# Altium PCB Модуль STM32F103RBT6.PcbDoc
Units mm, origin at the board's own origin, x right, y up, seen from the top; angles counter-clockwise.
Board outline 60 x 40 mm, 2 copper layers (Top Layer, Bottom Layer); 19 components, 58 nets, 200 pads, 36 vias.
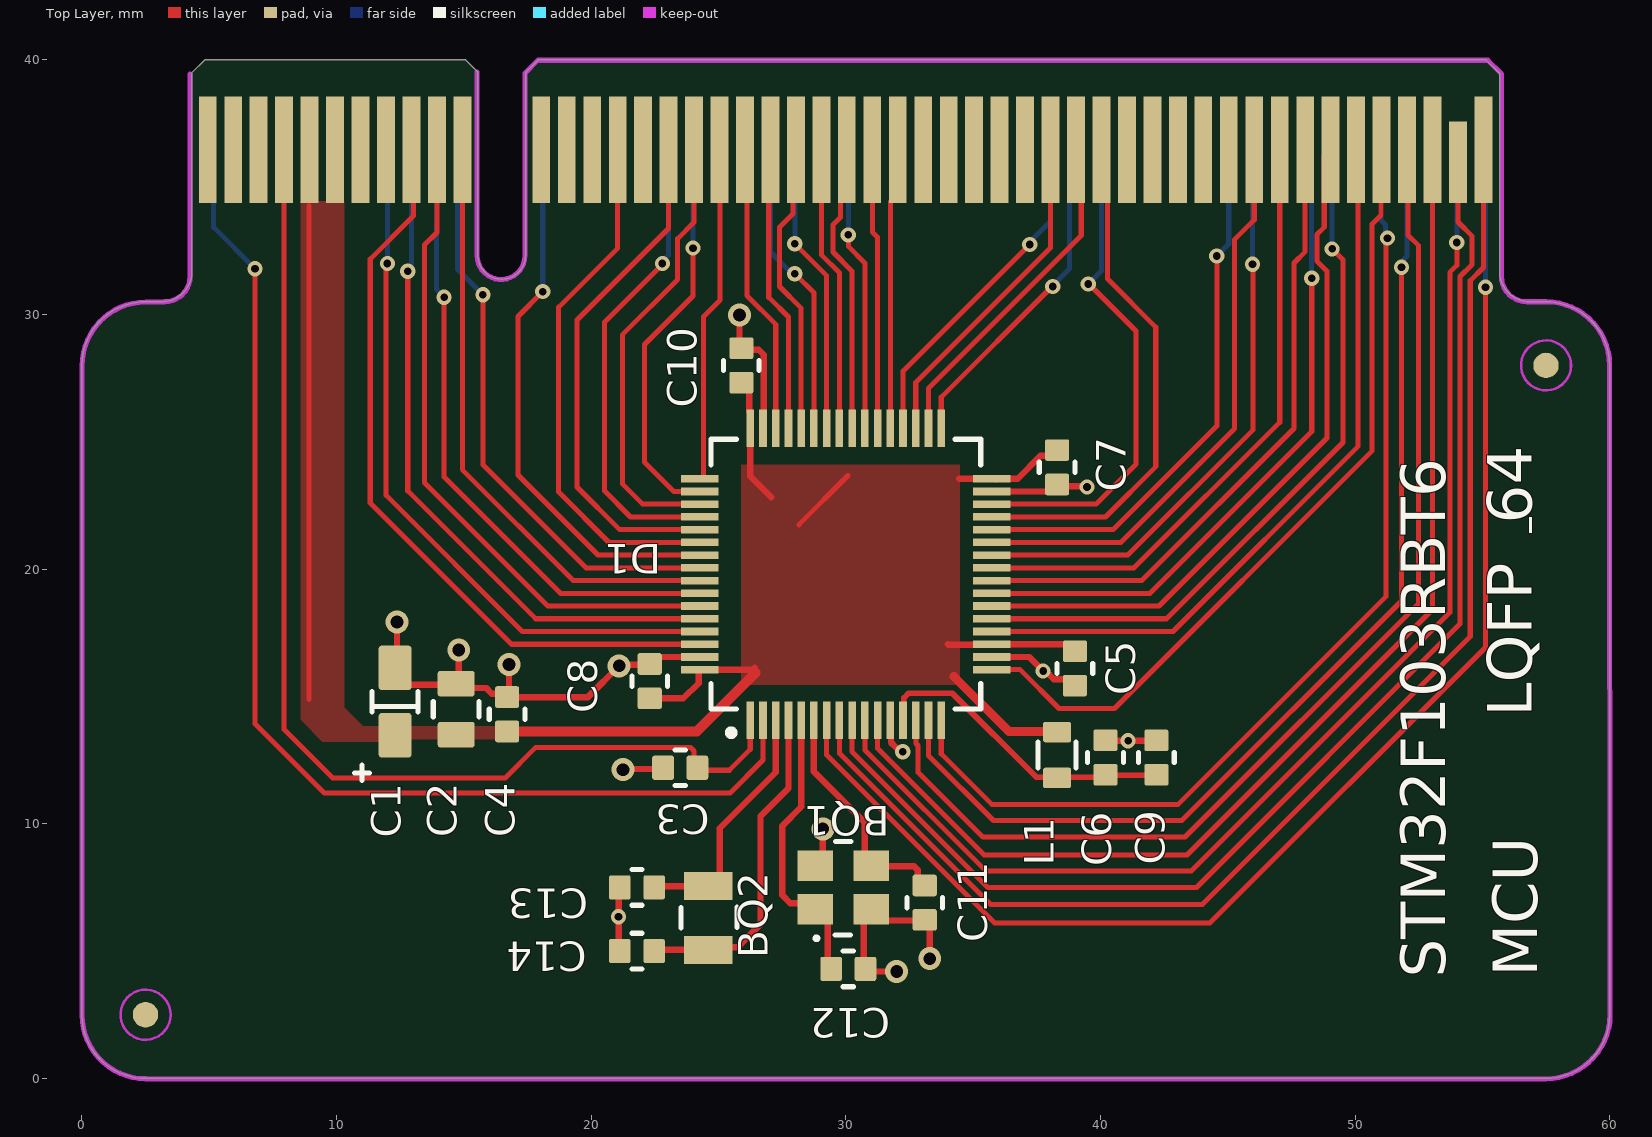
[diagram p0: Top Layer view]
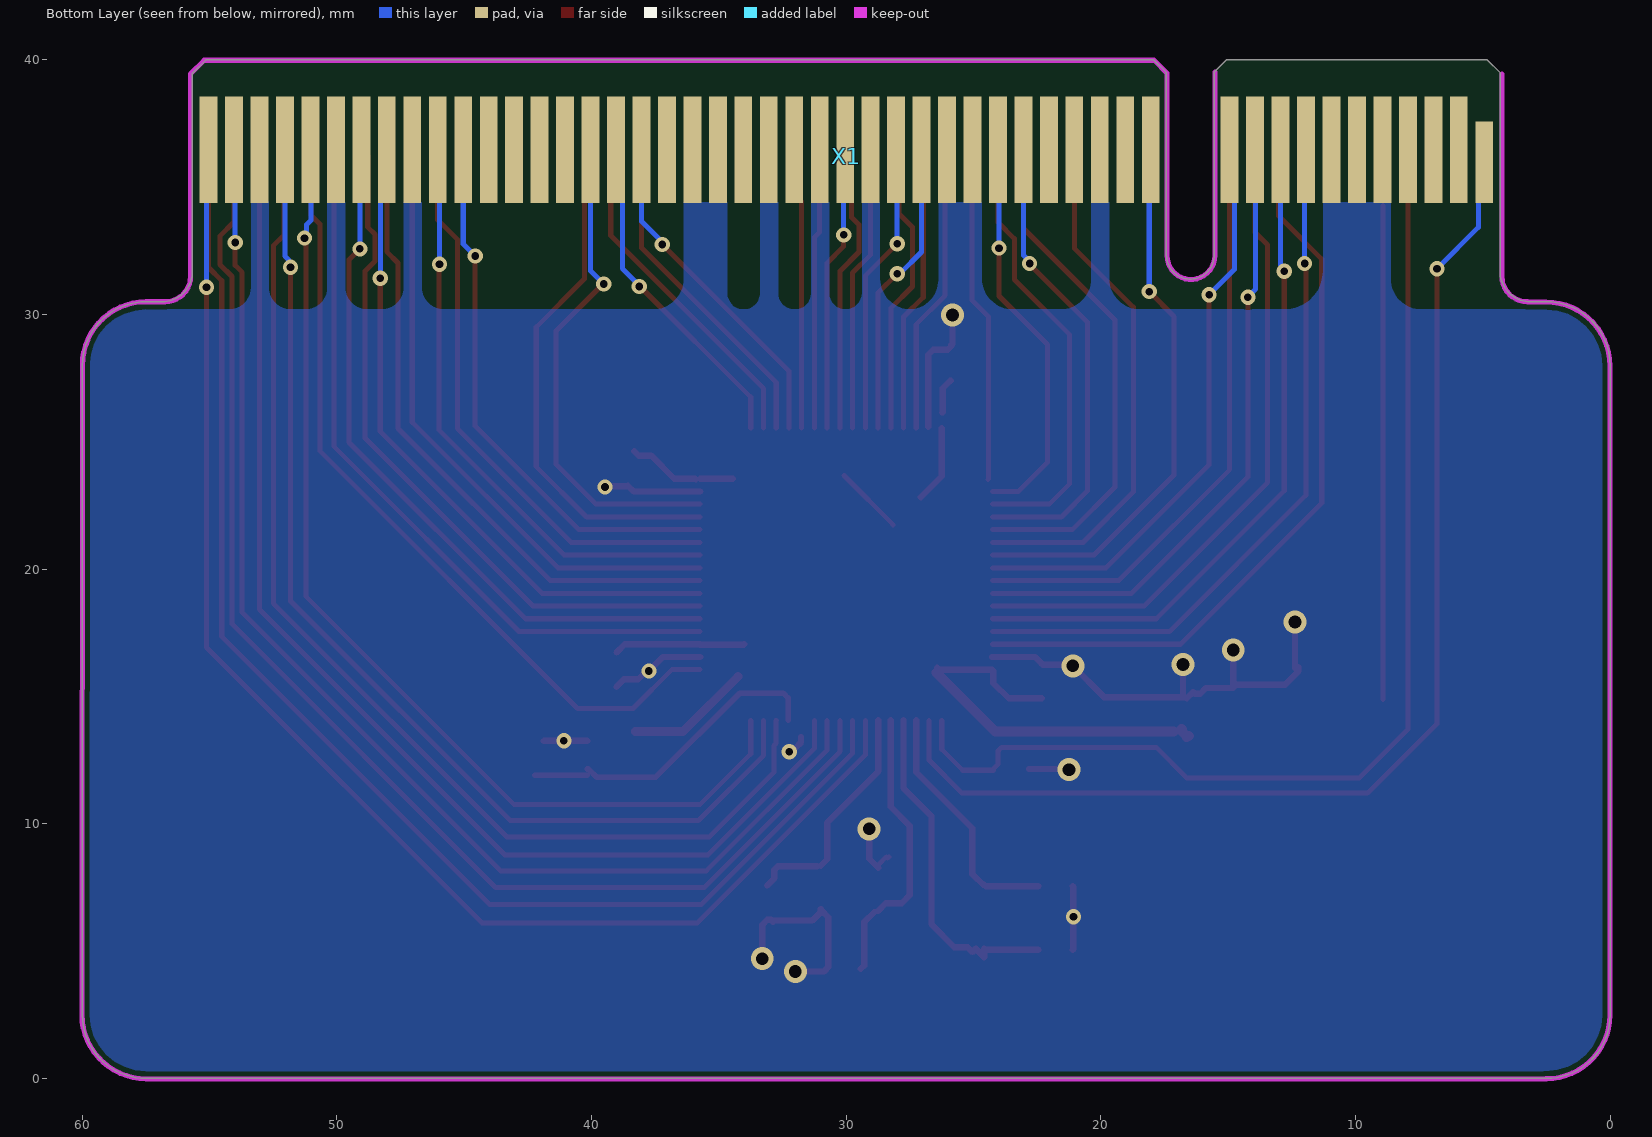
[diagram p1: Bottom Layer view, seen from below]
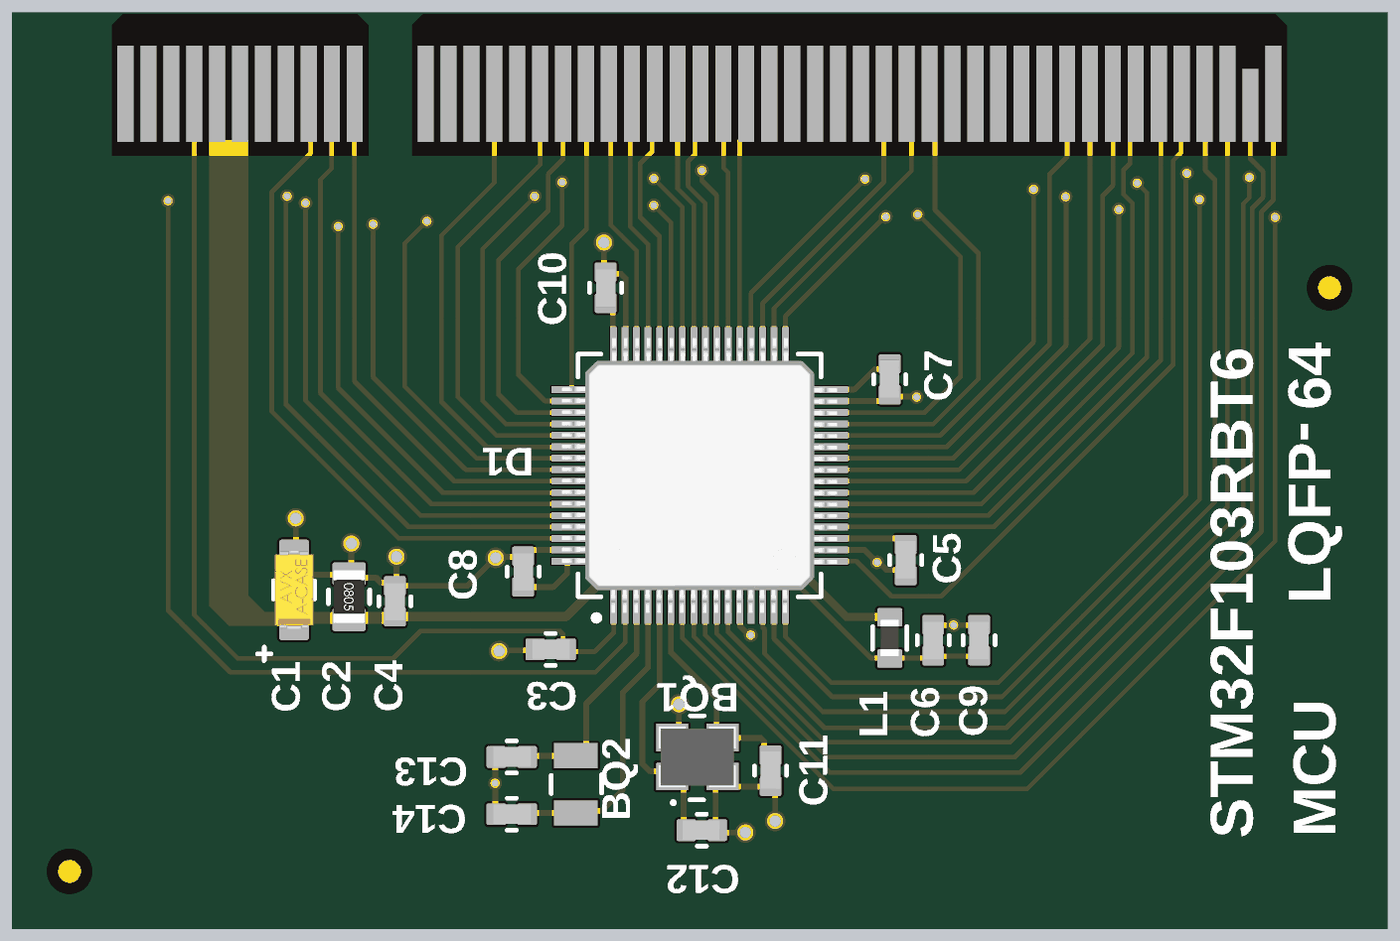
[diagram p2: 3D render of the assembled board from above, using the file's embedded part models]

## Layer stack, top to bottom
Top Solder: solder mask 0.0102, Solder Resist, Dk 3.5
Top Layer: signal copper 0.0356
Dielectric 1: dielectric 0.32, FR-4, Dk 4.8
Bottom Layer: signal copper 0.0356
Bottom Solder: solder mask 0.0102, Solder Resist, Dk 3.5

## Board outline
4.825,40 4.325,39.5 4.325,31.7 cw(c3.125,31.7) 3.125,30.5 2.5,30.5 ccw(c2.5,28) 0,28 0,2.5 ccw(c2.5,2.5) 2.5,0 57.5,0 ccw(c57.5,2.5) 60,2.5 60,28 ccw(c57.5,28) 57.5,30.5 56.875,30.5 cw(c56.875,31.7) 55.675,31.7 55.675,39.475 55.15,40 17.925,40 17.425,39.5 17.425,32.325 cw(c16.487,32.325) 15.55,32.325 15.55,39.525 15.075,40

## Design rules (kind name [scope] priority, off if disabled: settings)
Clearance [All] p1: gap=0.2 ignorepadtopadclearanceinfootprint=FALSE
ComponentClearance [All] p1 off: gap=0.254 collisioncheckmode=3 verticalgap=0.254 showdistances=FALSE
Height [All] p1 off: minheight=0 maxheight=25.4 prefheight=12.7
PolygonConnect [All] p1: connectstyle=Direct reliefconductorwidth=0.254 reliefentries=4 polygonreliefangle="90 Angle" airgapwidth=0.254
RoutingVias [All] p1: holewidth=0.5 width=0.9 viastyle="Through Hole" minholewidth=0.3 minwidth=0.6 maxholewidth=0.711 maxwidth=1.27
SolderMaskExpansion [All] p1: expansion=-0.8 istentingtop=FALSE soldermaskfromhole=TRUE
Width [All] p1: maxlimit=0.5 minlimit=0.2 preferedwidth=0.25 minimp=50.000000 maximp=50.000000 favimp=50.000000
28 further rules are at their usual default settings.

## Classes and differential pairs
component class "Модуль STM32F103RBT6": BQ1 BQ2 C1 C2 C3 C4 C5 C6 C7 C8 C9 C10 C11 C12 C13 C14 L1
component class "Модуль STM32F103RBT6_2": D1 X1

## Components (designator, comment, footprint, x,y, rotation, side; value= is the part's Value field where it differs from the comment)
BQ1 "кварцевый резонатор_1" SMD3225_4P20MHZ20PF10PPM 29.9,7.5 r0 top value="8 МГц"
BQ2 "3215" SMD3215_2P32768KHZ125PF10PPM 24.6,6.3 r270 top value="32,768 кГц"
C1 "A-case" K53-68_3216(A) 12.3,14.8 r90 top value="10 мк"
C2 "0805" K10-69B_2.0_1.25(0805) 14.7,14.5 r270 top value="1 мк"
C3 "0603" K10-79_1.6_0.8(0603) 23.5,12.2 r0 top value="0,01 мк"
C4 "0603" K10-79_1.6_0.8(0603) 16.7,14.3 r270 top value="0,1 мк"
C5 "0603" K10-79_1.6_0.8(0603) 39,16.1 r90 top value="0,01 мк"
C6 "0603" K10-79_1.6_0.8(0603) 40.2,12.6 r270 top value="0,1 мк"
C7 "0603" K10-79_1.6_0.8(0603) 38.3,24 r90 top value="0,01 мк"
C8 "0603" K10-79_1.6_0.8(0603) 22.3,15.6 r270 top value="0,01 мк"
C9 "0603" K10-79_1.6_0.8(0603) 42.2,12.6 r270 top value="0,01 мк"
C10 "0603" K10-79_1.6_0.8(0603) 25.9,28 r270 top value="0,01 мк"
C11 "0603" K10-79_1.6_0.8(0603) 33.1,6.9 r90 top value=30
C12 "0603" K10-79_1.6_0.8(0603) 30.1,4.3 r180 top value=30
C13 "0603" K10-79_1.6_0.8(0603) 21.8,7.5 r0 top value=15
C14 "0603" K10-79_1.6_0.8(0603) 21.8,5 r0 top value=15
D1 "(LQFP-48) Xilinx" QFP50P1200X1200X160-64N 30,19.8 r90 top value=STM32F103VBT6
L1 "0603" 742792651 38.3,12.7 r270 top value=TL160808
X1 "KONT_POLE_MEZ" 3113-112t_otv 31.043,35.97 r180 bottom

## Footprints (in the part's own frame and the unit in brackets; to place one, negate y for a bottom-side part, rotate by r counter-clockwise, add the part's x,y. Pads: shape width x height; smd on the part's side, far side on the other; paste and mask are expansions set on the pad)
3113-112t_otv [mm]
  rect 0.7x3.2 smd: A1(26.1,0)
  rect 0.7x4.2 smd: A2(25.1,0.5) A3(24.1,0.5) A4(23.1,0.5) A5(22.1,0.5) A6(21.1,0.5) A7(20.1,0.5) A8(19.1,0.5) A9(18.1,0.5) A10(17.1,0.5) A11(16.1,0.5) A12(13,0.5) A13(12,0.5) A14(11,0.5) A15(10,0.5) A16(9,0.5) A17(8,0.5) A18(7,0.5) A19(6,0.5) A20(5,0.5) A21(4,0.5) A22(3,0.5) A23(2,0.5) A24(1,0.5) A25(0,0.5) A26(-1,0.5) A27(-2,0.5) A28(-3,0.5) A29(-4,0.5) A30(-5,0.5) A31(-6,0.5) A32(-7,0.5) A33(-8,0.5) A34(-9,0.5) A35(-10,0.5) A36(-11,0.5) A37(-12,0.5) A38(-13,0.5) A39(-14,0.5) A40(-15,0.5) A41(-16,0.5) A42(-17,0.5) A43(-18,0.5) A44(-19,0.5) A45(-20,0.5) A46(-21,0.5) A47(-22,0.5) A48(-23,0.5) A49(-24,0.5)
  rect 0.7x4.2 smd far side: B1(26.1,0.5) B2(25.1,0.5) B3(24.1,0.5) B4(23.1,0.5) B5(22.1,0.5) B6(21.1,0.5) B7(20.1,0.5) B8(19.1,0.5) B9(18.1,0.5) B10(17.1,0.5) B11(16.1,0.5) B12(13,0.5) B13(12,0.5) B14(11,0.5) B15(10,0.5) B16(9,0.5) B17(8,0.5) B18(7,0.5) B19(6,0.5) B20(5,0.5) B21(4,0.5) B22(3,0.5) B23(2,0.5) B24(1,0.5) B25(0,0.5) B26(-1,0.5) B27(-2,0.5) B28(-3,0.5) B29(-4,0.5) B30(-5,0.5) B31(-6,0.5) B32(-7,0.5) B33(-8,0.5) B34(-9,0.5) B35(-10,0.5) B36(-11,0.5) B37(-12,0.5) B38(-13,0.5) B39(-14,0.5) B40(-15,0.5) B41(-16,0.5) B42(-17,0.5) B43(-18,0.5) B44(-19,0.5) B45(-20,0.5) B46(-21,0.5) B47(-22,0.5) B49(-24,0.5)
  rect 0.7x3.2 smd far side: B48(-23,0)
742792651 [mm]
  rrect20% 0.8x1.1 smd mask+0.102: 1(-0.9,0) 2(0.9,0)
  silkscreen extent -0.5,-0.75 0.5,0.75, body extent -0.8,-0.4 0.8,0.4, height 0.78
K10-69B_2.0_1.25(0805) [mm]
  rrect20% 1x1.45 smd mask+0.1: 1(-1,0) 2(1,0)
  silkscreen extent -0.3,-0.9 0.3,0.9, body extent -1.15,-0.67 1.15,0.68, height 0.76
K10-79_1.6_0.8(0603) [mm]
  rrect20% 0.85x0.95 smd mask+0.1: 1(-0.675,0) 2(0.675,0)
  silkscreen extent -0.2,-0.7 0.2,0.7, body extent -0.8,-0.42 0.84,0.43, height 0.41
K53-68_3216(A) [mm] "Molded Capacitor, 2-Leads, Body 3,20x1,60mm, IPC Medium Density"
  rrect20% 1.75x1.3 smd mask+0.1: 1(-1.325,0) 2(1.325,0)
  silkscreen extent -3.1,-0.9 0.4,1.6, body extent -1.7,-0.84 1.7,0.84, height 1.71
QFP50P1200X1200X160-64N [mm]
  rect 1.475x0.3 smd mask+0.05: 1(-5.738,3.75) 2(-5.738,3.25) 3(-5.738,2.75) 4(-5.738,2.25) 5(-5.738,1.75) 6(-5.738,1.25) 7(-5.738,0.75) 8(-5.738,0.25) 9(-5.738,-0.25) 10(-5.738,-0.75) 11(-5.738,-1.25) 12(-5.738,-1.75) 13(-5.738,-2.25) 14(-5.738,-2.75) 15(-5.738,-3.25) 16(-5.738,-3.75) 33(5.738,-3.75) 34(5.738,-3.25) 35(5.738,-2.75) 36(5.738,-2.25) 37(5.738,-1.75) 38(5.738,-1.25) 39(5.738,-0.75) 40(5.738,-0.25) 41(5.738,0.25) 42(5.738,0.75) 43(5.738,1.25) 44(5.738,1.75) 45(5.738,2.25) 46(5.738,2.75) 47(5.738,3.25) 48(5.738,3.75)
  rect 0.3x1.475 smd mask+0.05: 17(-3.75,-5.738) 18(-3.25,-5.738) 19(-2.75,-5.738) 20(-2.25,-5.738) 21(-1.75,-5.738) 22(-1.25,-5.738) 23(-0.75,-5.738) 24(-0.25,-5.738) 25(0.25,-5.738) 26(0.75,-5.738) 27(1.25,-5.738) 28(1.75,-5.738) 29(2.25,-5.738) 30(2.75,-5.738) 31(3.25,-5.738) 32(3.75,-5.738) 49(3.75,5.738) 50(3.25,5.738) 51(2.75,5.738) 52(2.25,5.738) 53(1.75,5.738) 54(1.25,5.738) 55(0.75,5.738) 56(0.25,5.738) 57(-0.25,5.738) 58(-0.75,5.738) 59(-1.25,5.738) 60(-1.75,5.738) 61(-2.25,5.738) 62(-2.75,5.738) 63(-3.25,5.738) 64(-3.75,5.738)
  silkscreen extent -6.35,4.38 -6.1,4.62, body extent -6,-6 6,6, height 1.31
SMD3215_2P32768KHZ125PF10PPM [mm]
  rect 1.1x1.9 smd mask+0.102: 1(-1.25,0) 2(1.25,0)
  silkscreen extent -0.42,-1.07 0.4,1.13
SMD3225_4P20MHZ20PF10PPM [mm]
  rect 1.4x1.2 smd mask+0.102: 1(-1.1,-0.85) 2(1.1,-0.85) 3(1.1,0.85) 4(-1.1,0.85)
  silkscreen extent -1.1,-2.05 -1,-1.95, body extent -1.68,-1.33 1.68,1.33, height 0.9

## Part data
BQ1: Package=0705, PartNumber=MQ-12.000-18, Company=Mercury
BQ2: library part "кварцевый резонатор", PartNumber="32,768 кГц 3215 SMD", Company=Mercury, Package=3215
C1: library part C+, Package=A-case
C2 C3 C4 C5 C6 C7 C8 C9 C10 C11 C12 C13 C14: library part C
  C2: Package=0805
  C3 C4 C5 C6 C7 C8 C9 C10 C11 C12 C13 C14: Package=0603
D1: library part STM32F103RBT6, Package=LQFP-48, Company=Xilinx, PurtNamber=XC6SLX25-2FGG484C
L1: library part SH6028-5R0YLB, CurrentMax=2,4А, PartNumber=TL160808, Company="ABC Electronics Group", Package=0603
X1: library part 3113-112T

## Free pads (board coordinates)
  round 1 smd paste-1 mask+0.5: 1(2.5,2.5) 1(57.5,28)

## Via types
v1: diameter 0.6, hole 0.3, Top Layer to Bottom Layer, 27 vias
v2: diameter 0.9, hole 0.5, Top Layer to Bottom Layer, 9 vias

## Nets (pads, with @x,y where several pads share a name; then routed paths per layer and width w, separated by ;. In a path a pad name is that pad's centre, name@x,y a point inside that pad or via, vN(x,y) a via of type N, cw(c..) or ccw(c..) an arc to the next point about the centre after c; other vN are vias at no path point)
3V3: C1.1 C2.2 C4.2 C5.2 C7.2 C8.2 C10.2 D1.19 D1.32 D1.48 D1.64 L1.1 X1.B5 X1.B6 | length 56.2
  Top Layer w0.2: 8.925,14.875 8.925,34.28 ; 28.158,21.742 30.09,23.675
  Top Layer w0.25: C8.2@22.325,14.925 23.625,14.925 24.221,15.521 24.221,16 D1.64@24.246,16.025 ; D1.64 26.35,16.05 26.425,16.125 ; C10.2@25.9,27.4 25.915,27.4 26.215,27.1 26.215,26.16 D1.48@26.225,26.151 ; D1.48 26.25,23.65 27.075,22.825 ; 34,17.05 34.025,17.025 D1.19@35.738,17.025 ; 34.453,23.55 D1.32 ; D1.19 38.7,17.05 C5.2@39.025,16.725 ; D1.32@35.913,23.525 35.938,23.55 36.75,23.55 37.647,24.447 38.147,24.447 C7.2@38.325,24.625
  Top Layer w0.35: 34.251,15.776 36.401,13.625 L1.1@38.275,13.625
  Top Layer w0.4: C4.2@16.55,13.45 C4.2@16.634,13.414 ; C4.2@16.791,13.606 C4.2@16.825,13.725 ; C4.2@17.125,13.625 24.15,13.625 26.454,15.929
BOOT0: D1.60 X1.A9 | length 27
  Top Layer w0.2: v1(12.8,31.7) 12.8,23.075 17.825,18.05 D1.60
  Bottom Layer w0.2: v1(12.8,31.7) 12.8,31.808 12.943,31.951 X1.A9
BOOT1: D1.28 X1.A39 | length 21.6
  Top Layer w0.2: D1.28 40.5,21.55 44.575,25.625 v1(44.575,32.299)
  Bottom Layer w0.2: v1(44.575,32.299) 45.043,32.766 X1.A39
GND: BQ1.2 BQ1.4 C1.2 C2.1 C3.1 C4.1 C5.1 C6.1 C7.1 C8.1 C9.1 C10.1 C11.1 C12.1 C13.1 C14.1 D1.12 D1.18 D1.31 D1.47 D1.63 X1.A5 X1.A6 X1.A7 X1.A14 X1.A19 X1.A20 X1.A23 X1.A25 X1.A27 X1.A29 X1.A30 X1.A41 X1.A44 X1.A47 | length 47.6
  Top Layer w0.2: BQ1.4@28.325,8.7 BQ1.4@28.375,8.65 ; BQ1.4@28.425,8.7 28.75,8.375 BQ1.4@28.75,8.275
  Top Layer w0.25: C1.2@12.25,16.15 12.239,16.139 12.239,15.989 12.762,15.466 C2.1@14.684,15.466 ; C1.2@12.35,16.1 12.375,16.125 v2(12.375,17.925) ; C2.1@14.675,15.475 C2.1@14.684,15.466 ; C2.1@14.775,15.479 14.8,15.504 v2(14.8,16.825) ; C4.1@16.625,14.925 16.375,15.175 16.311,15.111 16.104,15.111 15.882,15.332 14.818,15.332 C2.1@14.684,15.466 ; v2(16.775,16.25) 16.775,15.03 16.72,14.975 19.875,14.975 21.138,16.238 22.288,16.238 C8.1@22.325,16.275 ; C14.1@21.1,5.05 21.088,5.062 21.088,6.337 v1(21.075,6.35) 21.088,6.362 21.088,7.537 C13.1@21.1,7.55 ; v2(21.25,12.125) 21.275,12.15 C3.1@22.825,12.15 ; C8.1 22.575,16.55 D1.63 ; v2(25.826,29.976) 25.826,28.849 C10.1@25.875,28.8 ; C10.1@25.875,28.75 26.016,28.609 26.579,28.609 26.775,28.413 D1.47@26.775,25.594 ; BQ1.4@28.75,8.275 29.1,8.625 v2(29.1,9.8) ; BQ1.2 31,6.525 BQ1.2@31.325,6.2 ; D1.12@31.775,13.391 31.775,13.19 31.965,12.999 32.142,12.825 v1(32.236,12.825) ; v2(32,4.2) 30.875,4.2 30.7,4.375 30.7,6.325 30.95,6.575 BQ1.2@31.325,6.2 ; v2(33.3,4.7) 33.3,6.025 C11.1 32.95,6.225 32.875,6.15 32.825,6.2 BQ1.2@31.325,6.2 ; D1.18 37.2,16.55 v1(37.75,16) 37.845,16 38.175,15.67 38.73,15.67 C5.1@39.025,15.375 ; D1.31 38.35,23.05 38.575,23.275 38.6,23.25 39.45,23.25 v1(39.475,23.225) ; C6.1@40.175,13.25 40.181,13.256 41.081,13.256 v1(41.088,13.263) 41.862,13.263 C9.1@41.875,13.25
  other v2: 21.1,16.2
JTCK: D1.49 X1.B19 | length 13.1
  Top Layer w0.2: D1.49@24.437,23.525 24.412,23.55 24.412,29.912 25.069,30.569 X1.B19@25.069,36.355
JTDI: D1.50 X1.A18 | length 14.9
  Top Layer w0.2: v1(24,32.608) 24,30.725 22.1,28.825 22.1,24.2 23.25,23.05 D1.50
  Bottom Layer w0.2: v1(24,32.608) X1.A18@24,35.625
JTDO: D1.55 X1.A12 | length 21.6
  Top Layer w0.2: v1(18.1,30.9) 17.125,29.925 17.125,23.7 20.275,20.55 D1.55
  Bottom Layer w0.2: X1.A12 18.1,36.412 v1(18.1,30.9)
JTMS: D1.46 X1.B20 | length 11.1
  Top Layer w0.2: X1.B20@25.925,36.352 X1.B20 ; X1.B20@26.125,36.025 26.125,30.738 27.25,29.613 D1.46
MCO: X1.B1
NetBQ1_1: BQ1.1 C12.2 D1.5 | length 11.1
  Top Layer w0.25: D1.5 28.25,10.663 27.5,9.913 27.5,7.2 27.821,6.879 28.446,6.879 BQ1.1@28.75,6.575 ; BQ1.1@28.9,6.525 29.3,6.125 29.3,4.425 C12.2
NetBQ1_3: BQ1.3 C11.2 D1.6 | length 9.1
  Top Layer w0.25: D1.6 28.75,12.05 30.75,10.05 30.75,8.6 BQ1.3 ; BQ1.3@31.15,8.329 32.681,8.329 32.827,8.183 32.827,7.848 C11.2
NetBQ2_1: BQ2.1 C13.2 D1.3 | length 9.7
  Top Layer w0.25: C13.2@22.45,7.55 24.525,7.55 BQ2.1@24.55,7.575 ; BQ2.1@24.575,7.6 24.625,7.6 25.05,8.025 25.05,9.819 27.25,12.019 D1.3
NetBQ2_2: BQ2.2 C14.2 D1.4 | length 13.7
  Top Layer w0.25: C14.2@22.45,5.05 BQ2.2@24.575,5.05 ; BQ2.2@24.575,5.1 BQ2.2@24.575,5.05 ; BQ2.2@24.904,5.079 24.575,4.75 BQ2.2@24.575,5.05 ; BQ2.2@24.904,5.1 25.043,4.961 25.235,5.154 25.754,5.154 26.65,6.05 26.65,10.3 27.75,11.4 D1.4
NetC6_2: C6.2 C9.2 D1.13 L1.2 | length 12.4
  Top Layer w0.22: D1.13@32.275,14.07 32.284,14.079 32.284,14.943 32.466,15.125 34.184,15.125 37.484,11.825 38.3,11.825 39.8,11.825 40.125,12.15 C6.2@40.175,12.15 ; C6.2@40.175,11.9 C9.2@42.225,11.9
nJTRST: D1.56 X1.A11 | length 23.1
  Top Layer w0.2: v1(15.75,30.775) 15.75,24.1 19.8,20.05 D1.56
  Bottom Layer w0.2: X1.A11 14.75,36.277 14.75,31.775 v1(15.75,30.775)
nRST: D1.7 X1.A49 | length 54
  Top Layer w0.2: D1.7 29.25,12.699 35.849,6.1 44.3,6.1 55.125,16.925 v1(55.125,31.075)
  Bottom Layer w0.2: X1.A49 55.125,36.387 v1(55.125,31.075)
PA0: D1.14 X1.B46 | length 44.6
  Top Layer w0.2: D1.14 32.755,14.057 32.755,13.155 32.836,13.073 32.836,12.023 35.384,9.475 43.325,9.475 52.5,18.65 52.5,32.7 52.075,33.125 X1.B46@52.075,36.47
PA1: D1.15 X1.A46 | length 42.4
  Top Layer w0.2: D1.15 33.25,12.675 35.8,10.125 43.2,10.125 51.825,18.75 v1(51.825,31.85)
  Bottom Layer w0.2: v1(51.825,31.85) 51.902,31.927 51.902,32.151 52.043,32.292 X1.A46
PA2: D1.16 X1.A45 | length 40.7
  Top Layer w0.2: D1.16 33.75,12.75 35.75,10.75 43.04,10.75 51.225,18.935 51.225,32.951 v1(51.275,33.001)
  Bottom Layer w0.2: X1.A45 51.025,36.452 51.025,33.701 51.198,33.527 51.198,33.077 v1(51.275,33.001)
PA3: D1.17 X1.B45 | length 31.7
  Top Layer w0.2: D1.17 36.85,16.05 38.375,14.525 40.55,14.525 50.675,24.65 50.675,33.55 51.025,33.9 X1.B45@51.025,34.72 ; X1.B45@51.043,34.72 X1.B45
PA4: D1.20 X1.B44 | length 29.1
  Top Layer w0.2: D1.20 42.85,17.55 50.125,24.825 50.125,36.387 X1.B44
PA5: D1.21 X1.A43 | length 28.4
  Top Layer w0.2: D1.21 42.6,18.05 49.525,24.975 49.525,32.15 v1(49.1,32.575)
  Bottom Layer w0.2: X1.A43 49.1,36.412 v1(49.1,32.575)
PA6: D1.22 X1.B43 | length 27.6
  Top Layer w0.2: D1.22 42.3,18.55 48.9,25.15 48.9,31.699 48.5,32.099 48.5,33.138 48.793,33.43 48.793,36.22 X1.B43
PA7: D1.23 X1.A42 | length 26
  Top Layer w0.2: D1.23 41.95,19.05 48.3,25.4 v1(48.3,31.418)
  Bottom Layer w0.2: X1.A42@48.293,36.22 48.293,31.426 v1(48.3,31.418)
PA8: D1.41 X1.B23 | length 11.2
  Top Layer w0.2: X1.B23 29.043,32.342 29.75,31.634 D1.41
PA9: D1.42 X1.A22 | length 11.6
  Top Layer w0.2: v1(28,32.775) 29.25,31.525 D1.42
  Bottom Layer w0.2: v1(28,32.775) 28,36.177 27.875,36.302 X1.A22
PA10: D1.43 X1.A21 | length 11.7
  Top Layer w0.2: v1(28,31.6) 28.75,30.85 D1.43
  Bottom Layer w0.2: X1.A21 27.043,32.457 27.9,31.6 v1(28,31.6)
PA11: D1.44 X1.B22 | length 10.4
  Top Layer w0.2: X1.B22@27.925,35.35 27.925,33.952 27.4,33.427 27.4,31.1 28.25,30.25 D1.44
PA12: D1.45 X1.B21 | length 10.7
  Top Layer w0.2: X1.B21@26.975,35.9 26.975,30.675 27.75,29.9 D1.45
PB0: D1.26 X1.A40 | length 23.3
  Top Layer w0.2: D1.26 41.075,20.55 46,25.475 46,31.95 v1(45.975,31.975)
  Bottom Layer w0.2: v1(45.975,31.975) 45.975,36.402 X1.A40
PB1: D1.27 X1.B40 | length 22.7
  Top Layer w0.2: D1.27 40.8,21.05 45.275,25.525 45.275,32.95 46.043,33.718 X1.B40
PB5: D1.57 X1.B11 | length 23.7
  Top Layer w0.2: X1.B11 14.943,23.907 19.3,19.55 D1.57
PB6: D1.58 X1.A10 | length 24.9
  Top Layer w0.2: v1(14.226,30.677) 14.226,23.624 18.8,19.05 D1.58
  Bottom Layer w0.2: X1.A10 13.925,36.452 13.925,30.994 14.226,30.693 v1(14.226,30.677)
PB7: D1.59 X1.B10 | length 26.1
  Top Layer w0.2: X1.B10 13.943,33.218 13.45,32.725 13.45,23.4 18.3,18.55 D1.59
PB8: D1.61 X1.A8 | length 28.1
  Top Layer w0.2: v1(12,32) 11.951,31.951 11.951,22.899 17.3,17.55 D1.61
  Bottom Layer w0.2: X1.A8 12,36.412 v1(12,32)
PB9: D1.62 X1.B9 | length 29.7
  Top Layer w0.2: X1.B9@13.025,36.349 13.025,33.874 11.325,32.174 11.325,22.6 16.875,17.05 D1.62
PB10: D1.29 X1.B34 | length 20.6
  Top Layer w0.2: D1.29 40.2,22.05 42.175,24.025 42.175,29.5 40.275,31.4 40.275,36.237 X1.B34
PB11: D1.30 X1.A34 | length 19.7
  Top Layer w0.2: D1.30 39.827,22.55 41.4,24.123 41.4,29.349 39.549,31.2 v1(39.525,31.2)
  Bottom Layer w0.2: v1(39.525,31.2) 40.041,31.716 X1.A34@40.041,36.469
PB12: D1.33 X1.A33 | length 13.1
  Top Layer w0.2: D1.33 33.75,26.751 38.099,31.1 v1(38.125,31.1)
  Bottom Layer w0.2: v1(38.125,31.1) 38.125,31.138 38.793,31.806 38.793,36.22 X1.A33
PB13: D1.34 X1.B33 | length 13.5
  Top Layer w0.2: D1.34 33.25,27.1 39.25,33.1 39.25,36.262 X1.B33
PB14: D1.35 X1.B32 | length 13.1
  Top Layer w0.2: D1.35 32.75,27.325 38.043,32.618 X1.B32
PB15: D1.36 X1.A32 | length 13.3
  Top Layer w0.2: D1.36 32.25,27.775 v1(37.225,32.75)
  Bottom Layer w0.2: v1(37.225,32.75) 37.225,32.845 38.043,33.663 X1.A32
PC0: D1.8 X1.B49 | length 52.2
  Top Layer w0.2: D1.8 29.75,12.765 35.69,6.825 44,6.825 54.525,17.35 54.525,31.324 55.043,31.841 X1.B49
PC1: D1.9 X1.B48 | length 50.1
  Top Layer w0.2: D1.9 30.25,12.831 35.581,7.5 43.775,7.5 54.125,17.85 54.125,31.489 54.6,31.964 54.6,33.074 54.043,33.631 X1.B48
PC2: D1.10 X1.A48 | length 48.6
  Top Layer w0.2: D1.10 30.75,12.897 35.497,8.15 43.575,8.15 53.725,18.3 53.725,31.655 54,31.93 v1(54,32.825)
  Bottom Layer w0.2: v1(54,32.825) 54,36.427 X1.A48
PC3: D1.11 X1.B47 | length 46.7
  Top Layer w0.2: D1.11 31.25,12.962 35.437,8.775 43.4,8.775 53.043,18.418 X1.B47
PC4: D1.24 X1.B42 | length 25.5
  Top Layer w0.2: D1.24 41.625,19.55 47.6,25.525 47.6,32.025 48.043,32.468 X1.B42
PC5: D1.25 X1.B41 | length 24.4
  Top Layer w0.2: D1.25 41.325,20.05 47.043,25.768 X1.B41
PC6: D1.37 X1.B26 | length 11.1
  Top Layer w0.2: D1.37 31.75,34.427 32.043,34.72 X1.B26
PC7: D1.38 X1.B25 | length 11
  Top Layer w0.2: X1.B25 31.043,33.242 31.25,33.035 D1.38
PC8: D1.39 X1.A24 | length 11.2
  Top Layer w0.2: v1(30.1,33.125) 30.1,32.675 30.75,32.025 D1.39
  Bottom Layer w0.2: X1.A24 30.1,36.412 v1(30.1,33.125)
PC9: D1.40 X1.B24 | length 11.7
  Top Layer w0.2: X1.B24@29.825,36.775 29.793,36.743 29.793,33.819 29.5,33.527 29.5,32.45 30.25,31.7 D1.40
PC10: D1.51 X1.B18 | length 17.7
  Top Layer w0.2: X1.B18 24.043,33.618 23.4,32.975 23.4,31.375 21.225,29.2 21.225,23.35 22.025,22.55 D1.51
PC11: D1.52 X1.A17 | length 18.6
  Top Layer w0.2: v1(22.8,32) 22.8,31.975 20.525,29.7 20.525,23.075 21.55,22.05 D1.52
  Bottom Layer w0.2: v1(22.8,32) 22.8,32.083 23.043,32.326 X1.A17
PC12: D1.53 X1.B17 | length 20.2
  Top Layer w0.2: X1.B17 23.043,33.377 19.45,29.784 19.45,23.225 21.125,21.55 D1.53
PC13: D1.2 X1.A1 | length 46
  Top Layer w0.2: v1(6.8,31.8) 6.8,13.925 9.525,11.2 25.45,11.2 26.75,12.5 D1.2
  Bottom Layer w0.2: X1.A1 5.175,35.737 5.175,33.425 v1(6.8,31.8)
PD2: D1.54 X1.B15 | length 21.3
  Top Layer w0.2: D1.54 20.7,21.05 18.725,23.025 18.725,30.284 21.043,32.602 X1.B15@21.043,35.957 ; X1.B15@21.043,35.957 X1.B15 X1.B15@21.043,35.957
VBAT: C3.2 D1.1 X1.B4 | length 44.4
  Top Layer w0.2: X1.B4 7.943,13.707 9.85,11.8 16.626,11.8 17.826,13 23.9,13 24.042,12.858 24.042,12.333 C3.2 ; C3.2@24.225,12.1 25.425,12.1 26.25,12.925 D1.1
pads on no net: X1.A2 X1.A3 X1.A4 X1.A13 X1.A15 X1.A16 X1.A26 X1.A28 X1.A31 X1.A35 X1.A36 X1.A37 X1.A38 X1.B2 X1.B3 X1.B7 X1.B8 X1.B12 X1.B13 X1.B14 X1.B16 X1.B27 X1.B28 X1.B29 X1.B30 X1.B31 X1.B35 X1.B36 X1.B37 X1.B38 X1.B39

## Polygon pours and split planes (outlines as drawn)
3V3 on Top Layer "3V3_L01_P001" (solid, pour order 1): 25.9,24.1 25.9,15.45 34.475,15.45 34.475,24.1
3V3 on Top Layer "3V3_L01_P003" (solid, remove dead copper, pour order 3): 12.5,13.325 12.5,13.225 9.45,13.225 8.6,14.075 8.6,34.45 10.3,34.45 10.3,14.575 11.05,13.825 16.65,13.825 16.65,13.325
GND on Bottom Layer "Bottom Layer-GND" (solid, remove dead copper, pour order 4): 0,0 60.55,0 60.55,30.2 54.225,30.2 cw(c54.225,31.05) 53.375,31.05 53.375,34.425 52.675,34.425 52.675,31.05 cw(c51.825,31.05) 51.825,30.2 51.225,30.2 cw(c51.225,31.05) 50.375,31.05 50.375,34.4 49.675,34.4 49.675,31.05 cw(c48.825,31.05) 48.825,30.2 48.225,30.2 cw(c48.225,31.05) 47.375,31.05 47.375,34.4 46.675,34.4 46.675,31.05 cw(c45.825,31.05) 45.825,30.2 37.575,30.2 cw(c37.575,31.4) 36.375,31.4 36.375,34.4 34.675,34.4 34.675,30.825 cw(c34.056,30.825) 34.113,30.208 cw(c34.025,30.853) 33.375,30.853 33.375,34.4 32.675,34.4 32.675,30.824 cw(c32.051,30.824) 31.999,30.202 cw(c31.998,30.825) 31.375,30.825 31.375,34.4 30.675,34.4 30.675,30.85 cw(c30.025,30.85) 30.025,30.2 cw(c30.025,30.85) 29.375,30.85 29.375,34.4 28.675,34.4 28.675,31.4 cw(c27.476,31.4) 27.476,30.201 cw(c27.525,31.35) 26.375,31.35 26.375,34.4 24.675,34.4 24.675,31.4 cw(c23.475,31.4) 23.475,30.2 21.575,30.2 cw(c21.575,31.4) 20.375,31.4 20.375,34.4 19.675,34.4 19.675,31.4 cw(c18.475,31.4) 18.475,30.2 12.775,30.2 cw(c12.775,31.7) 11.275,31.7 11.275,34.4 8.625,34.4 8.625,31.4 cw(c7.425,31.4) 7.425,30.2 0,30.2

## Keep-outs
Top Layer:
  circle w0.1: c2.5,2.5 r0.983
  circle w0.1: c57.5,28 r0.983
Keep-Out Layer:
  lines w0.2: 0,2.525 0,27.975 ; 0.008,2.486 ccw(c2.508,2.486) 2.508,-0.014 ; 0.011,27.992 cw(c2.511,27.992) 2.511,30.492 3.242,30.492 ; 2.55,-0.017 57.491,-0.017 ccw(c57.491,2.512) 60.02,2.512 60,28 ccw(c57.5,28) 57.5,30.5 56.75,30.5 cw(c56.75,31.5) 55.75,31.5 55.75,39.45 55.217,39.983 54.608,39.983 18.108,39.983 17.908,39.983 17.4,39.475 17.4,32.3 ; 3.25,30.5 ccw(c3.25,31.5) 4.25,31.5 4.25,39.45 ; 15.525,32.3 15.525,39.525 ; 15.525,32.312 ccw(c16.463,32.312) 17.4,32.312

## Silkscreen, mask and mechanical layers (free items; w line width, h text height)
Top Overlay:
  lines w0.2: 24.7,15.5 24.7,14.5 25.7,14.5 ; 24.7,24.1 24.7,25.1 25.7,25.1 ; 29.575,5.625 30.175,5.625 ; 29.6,9.3 30.2,9.3 ; 34.3,14.5 35.3,14.5 35.3,15.5 ; 34.3,25.1 35.3,25.1 35.3,24.1
  text "-" at 55.711,22.15 h3 r270
  text "LQFP  64" at 57.528,14.2 h3 r90
  text "MCU" at 57.75,4 h3 r90
  text "STM32F103RBT6" at 54.139,3.95 h3 r90
Mechanical 4 (Mech5):
  lines w0.1: 0.305,52.713 0.314,52.722 ; 4.335,31.717 cw(c3.118,31.717) 3.118,30.5 2.5,30.5 ccw(c2.5,28) 0,28 0,2.5 ccw(c2.5,2.5) 2.5,0 57.5,0 ccw(c57.5,2.5) 60,2.5 60,28 ccw(c57.5,28) 57.5,30.5 56.743,30.516 cw(c56.743,31.616) 55.643,31.616 ; 55.643,31.557 55.643,31.675 ; 55.643,31.616 55.643,31.616